# EAGLE board ModuleCarrier-Laird-BL600 (EAGLE 7.7.0)
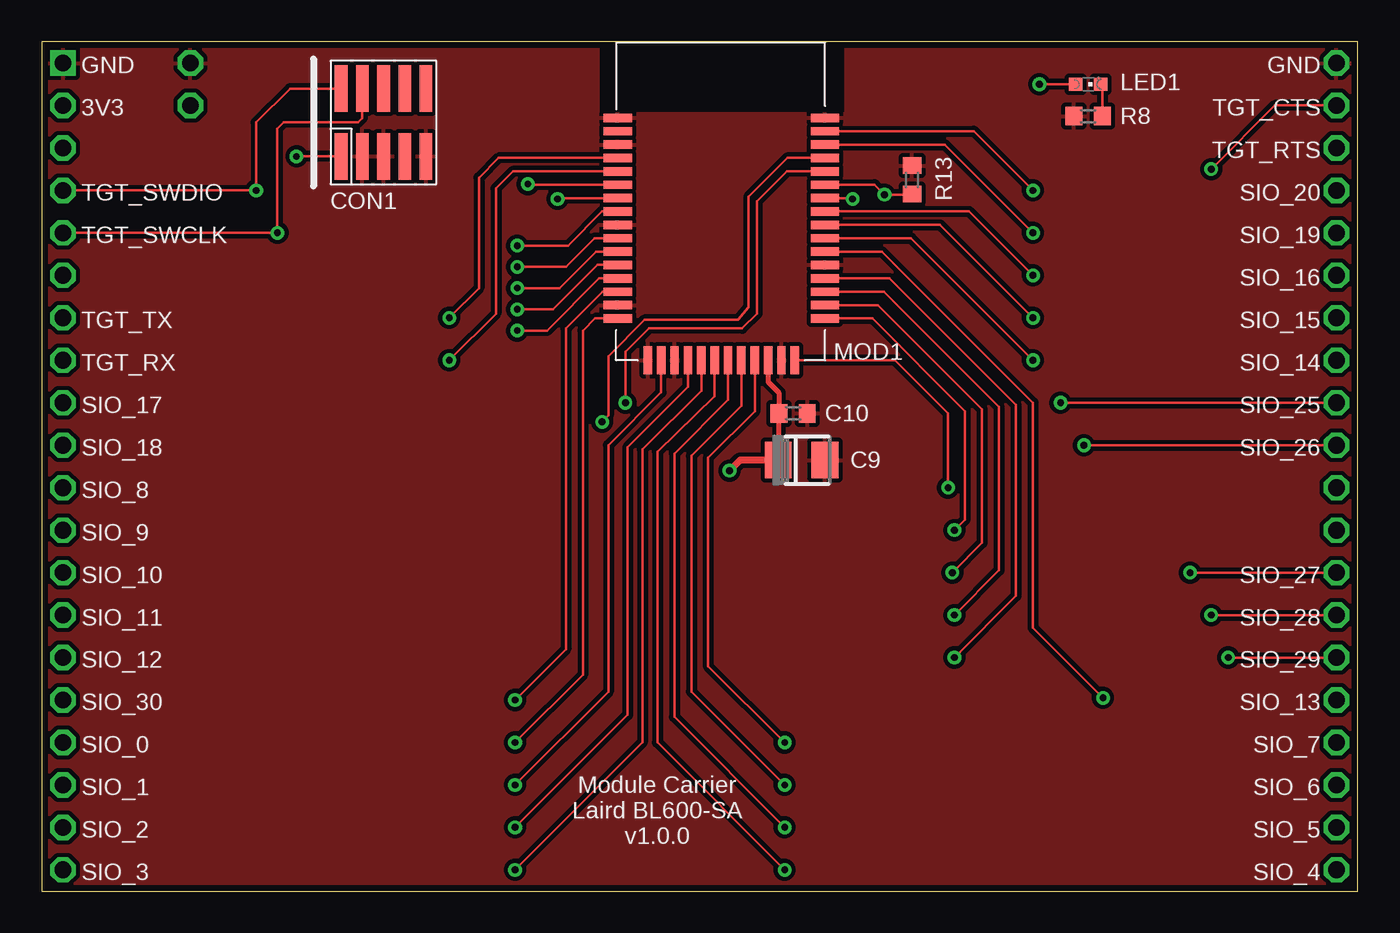
[diagram p0: board, top side]
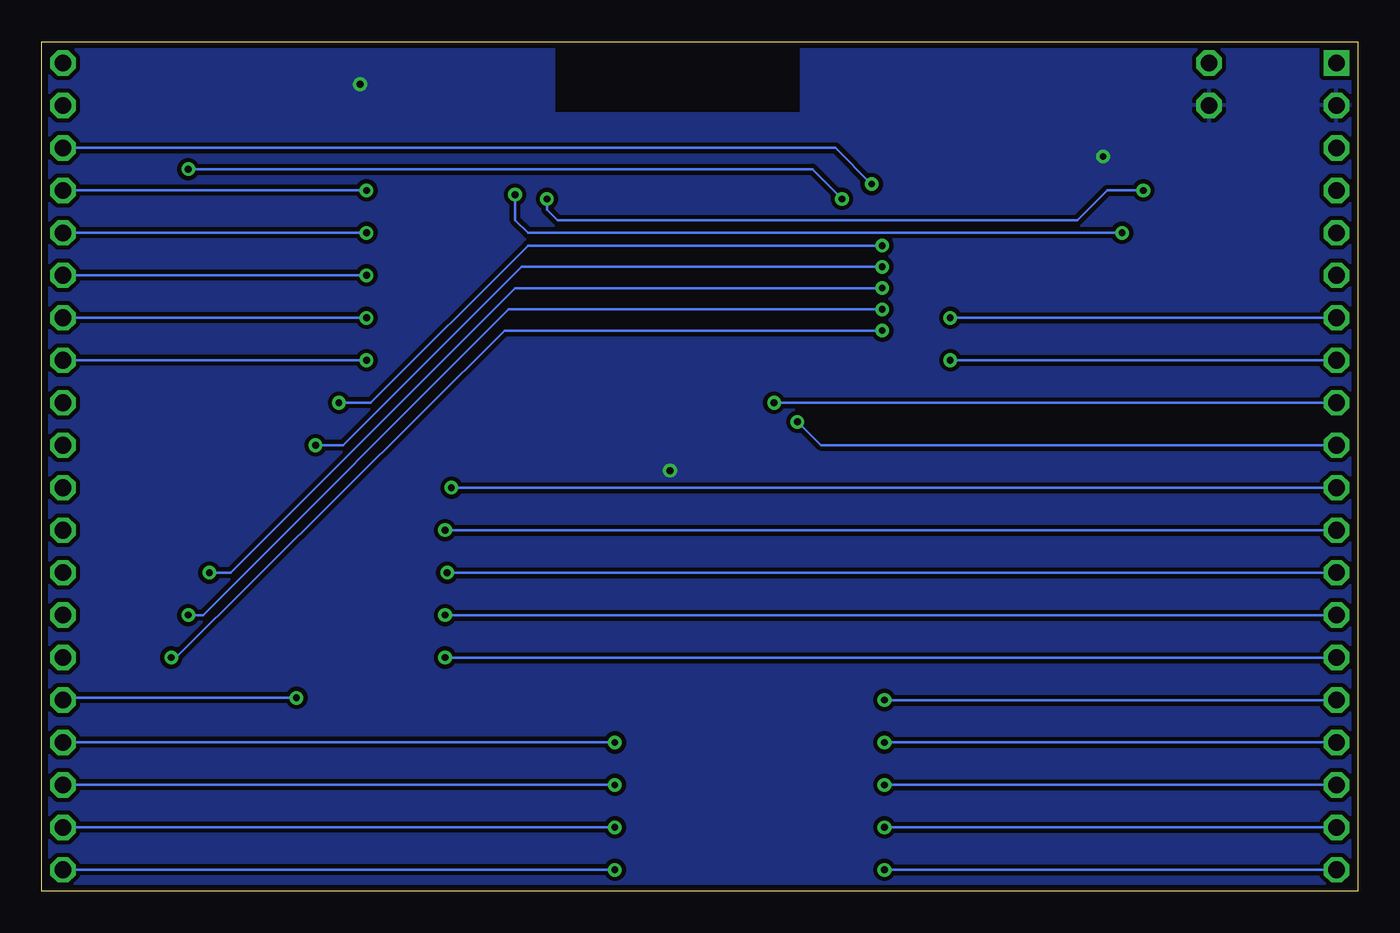
[diagram p1: board, bottom side, seen from below]

Size 78.74 x 50.8 mm. Coordinates in mm from the lower left corner, seen from the top.
Copper layers ((1*16)): Top 0.035mm / dielectric 0.8mm / Bottom 0.035mm
Design rules "mbed-HDK-6-6-2-layer-PCB-Panel": minimum track width 6mil, minimum drill 14mil, track to track 10mil, track to pad 10mil, pad to pad 10mil, via to via 10mil, smd to smd 6mil, copper to edge 15mil, drill to drill 8mil, minimum pad ring 10mil, minimum via ring 8mil, stop-mask expansion 4mil, vias tented up to drill 0mil, thermal gap 10mil
Net classes: 0 default: width 0.152 mm, drill 0.305 mm, clearance 0.152 mm
tRestrict: area 33.4,46.6 to 48,50.8
bRestrict: area 33.4,46.6 to 48,50.8

## Footprints (pad centres in the part's own frame; a part is rotated, then mirrored left to right if it is on the bottom)
CASE-B = smd 1.6 x 2.2: 1 -1.4,0; 2 1.4,0
0603 = smd 1 x 1.1: 1 -0.85,0; 2 0.85,0
FTSH-105-02 = smd 0.762 x 2.794: 1 0.381,-2.032; 2 0.381,2.032; 3 1.651,-2.032; 4 1.651,2.032; 5 2.921,-2.032; 6 2.921,2.032; 7 4.191,-2.032; 8 4.191,2.032; 9 5.461,-2.032; 10 5.461,2.032
CHIPLED_0603 = smd 0.8 x 0.8: A 0,-0.75; C 0,0.75
BL600 = smd 1.7 x 0.5: P$1 0,10.6; P$2 0,9.8; P$3 0,9; P$4 0,8.2; P$5 0,7.4; P$6 0,6.6; P$7 0,5.8; P$8 0,5; P$9 0,4.2; P$10 0,3.4; P$11 0,2.6; P$12 0,1.8 | smd 0.5 x 1.7: P$13 2.5,0; P$14 3.3,0; P$15 4.1,0; P$16 4.9,0; P$17 5.7,0; P$18 6.5,0; P$19 7.3,0; P$20 8.1,0; P$21 8.9,0; P$22 9.7,0; P$23 10.5,0; P$24 11.3,0; P$25 12.1,0; P$26 12.9,0; P$27 13.7,0; P$28 14.5,0; P$29 14.5,12.4; P$30 13.7,12.4; P$31 12.9,12.4; P$32 12.1,12.4; P$33 11.3,12.4; P$34 10.5,12.4; P$35 9.7,12.4; P$36 8.9,12.4; P$37 8.1,12.4; P$38 7.3,12.4; P$39 6.5,12.4; P$40 5.7,12.4; P$41 4.9,12.4; P$42 4.1,12.4; P$43 3.3,12.4; P$44 2.5,12.4
TP50-PTH = drill 1 octagon: TP 0,0
MODULE_DAUGHTER = drill 1 square: 1 0,0 | drill 1 octagon: 2 0,-2.54; 3 0,-5.08; 4 0,-7.62; 5 0,-10.16; 6 0,-12.7; 7 0,-15.24; 8 0,-17.78; 9 0,-20.32; 10 0,-22.86; 11 0,-25.4; 12 0,-27.94; 13 0,-30.48; 14 0,-33.02; 15 0,-35.56; 16 0,-38.1; 17 0,-40.64; 18 0,-43.18; 19 0,-45.72; 20 0,-48.26; 21 76.2,-48.26; 22 76.2,-45.72; 23 76.2,-43.18; 24 76.2,-40.64; 25 76.2,-38.1; 26 76.2,-35.56; 27 76.2,-33.02; 28 76.2,-30.48; 29 76.2,-27.94; 30 76.2,-25.4; 31 76.2,-22.86; 32 76.2,-20.32; 33 76.2,-17.78; 34 76.2,-15.24; 35 76.2,-12.7; 36 76.2,-10.16; 37 76.2,-7.62; 38 76.2,-5.08; 39 76.2,-2.54; 40 76.2,0

## Placement (x,y rotation side)
C9  10uF  [CASE-B]  45.47,25.78 0 top
C10  100nF  [0603]  44.96,28.58 0 top
CON1  SWD-10/TC2050_SMD  [FTSH-105-02]  17.53,45.97 0 top
LED1  RED  [CHIPLED_0603]  62.61,48.26 270 top
MOD1  BL600-SA  [BL600]  46.86,31.75 90 top
R8  1k  [0603]  62.61,46.36 0 top
R13  12k  [0603]  52.07,42.55 270 top
TP1  TEST-POINT-50R-PTH  [TP50-PTH]  8.89,46.99 0 top
TP2  TEST-POINT-50R-PTH  [TP50-PTH]  8.89,49.53 0 top
U$1  MODULE_DAUGHTER  [MODULE_DAUGHTER]  1.27,49.53 0 top

## Library data of the parts
C9 C10 R13 TP1 TP2 = mbed-HDK
CON1 = mbed-HDK-Connector
LED1 = mbed-HDK-Optical; MF: Wurth Electronics Inc; MFN: 150060RS75000; OC-DIGIKEY: 732-4978-1-ND; OC-MOUSER: 710-150060RS75000; OC-NEWARK: 2322071
MOD1 = laird
R8 = mbed-HDK-RLC
U$1 = Treadstone

## Nets
+3.3V_TGT: C9.1 C10.1 CON1.1 LED1.A MOD1.P$10 TP1.TP U$1.2
GND: C9.2 C10.2 CON1.3 CON1.5 CON1.9 MOD1.P$1 MOD1.P$3 MOD1.P$11 MOD1.P$17 MOD1.P$28 MOD1.P$29 MOD1.P$31 MOD1.P$37 MOD1.P$43 R8.1 R13.1 TP2.TP U$1.1 U$1.40
PA_1: LED1.C R8.2
SIO_0: MOD1.P$44 U$1.17
SIO_1: MOD1.P$2 U$1.18
SIO_2: MOD1.P$4 U$1.19
SIO_3: MOD1.P$5 U$1.20
SIO_4: MOD1.P$6 U$1.21
SIO_5: MOD1.P$7 U$1.22
SIO_6: MOD1.P$8 U$1.23
SIO_7: MOD1.P$9 U$1.24
SIO_8: MOD1.P$12 U$1.11
SIO_9: MOD1.P$13 U$1.12
SIO_10: MOD1.P$14 U$1.13
SIO_11: MOD1.P$15 U$1.14
SIO_12: MOD1.P$16 U$1.15
SIO_13: MOD1.P$18 U$1.25
SIO_14: MOD1.P$19 U$1.33
SIO_15: MOD1.P$20 U$1.34
SIO_16: MOD1.P$21 U$1.35
SIO_17: MOD1.P$24 U$1.9
SIO_18: MOD1.P$25 U$1.10
SIO_19: MOD1.P$26 U$1.36
SIO_20: MOD1.P$27 U$1.37
SIO_25: MOD1.P$36 U$1.32
SIO_26: MOD1.P$38 U$1.31
SIO_27: MOD1.P$39 U$1.28
SIO_28: MOD1.P$40 U$1.27
SIO_29: MOD1.P$41 U$1.26
SIO_30: MOD1.P$42 U$1.16
TGT_CTS: MOD1.P$35 U$1.39
TGT_RTS: MOD1.P$34 U$1.38
TGT_RX: MOD1.P$33 U$1.8
TGT_SWCLK: CON1.4 MOD1.P$23 R13.2 U$1.5
TGT_SWDIO: CON1.2 MOD1.P$22 U$1.4
TGT_TX: MOD1.P$32 U$1.7

## Tracks (layer width: path | path; a pad name or v marks a point on that pad's centre or on a via)
+3.3V_TGT  (via drill 0.41)
  Top 0.152: LED1.A v59.69,48.26 | CON1.1 v15.24,43.94
  Top 0.305: C9.1 44.11,25.78 C10.1 44.11,29.81 43.46,30.45 MOD1.P$10
  Top 0.406: MOD1.P$10 43.47,31.74 | C9.1 41.78,25.78 v41.15,25.15
  pour Bottom: 0,0 78.74,0 78.74,50.8 0,50.8
GND
  pour Top: 0,50.8 78.74,50.8 78.74,0 0,0
PA_1
  Top 0.152: LED1.C 63.46,48.26 R8.2
SIO_0  (via drill 0.41)
  Top 0.152: MOD1.P$44 33.11,34.25 32.38,33.53 32.38,12.95 v28.32,8.89
  Bottom 0.152: v28.32,8.89 U$1.17
SIO_1  (via drill 0.41)
  Top 0.152: v28.32,6.35 33.91,11.94 33.91,26.67 37.06,29.82 MOD1.P$2
  Bottom 0.152: v28.32,6.35 U$1.18
SIO_2  (via drill 0.41)
  Top 0.152: v28.32,3.81 35.05,10.54 35.05,26.54 38.66,30.15 MOD1.P$4
  Bottom 0.152: v28.32,3.81 U$1.19
SIO_3  (via drill 0.41)
  Top 0.152: v28.32,1.27 35.94,8.89 35.94,26.42 39.46,29.94 MOD1.P$5
  Bottom 0.152: v28.32,1.27 U$1.20
SIO_4  (via drill 0.41)
  Top 0.152: MOD1.P$6 40.26,29.6 36.83,26.29 36.83,8.89 v44.45,1.27
  Bottom 0.152: v44.45,1.27 U$1.21
SIO_5  (via drill 0.41)
  Top 0.152: MOD1.P$7 41.06,29.38 37.85,26.16 37.85,10.41 v44.45,3.81
  Bottom 0.152: v44.45,3.81 U$1.22
SIO_6  (via drill 0.41)
  Top 0.152: MOD1.P$8 41.86,29.04 38.86,26.04 38.86,11.94 v44.45,6.35
  Bottom 0.152: v44.45,6.35 U$1.23
SIO_7  (via drill 0.41)
  Top 0.152: MOD1.P$9 42.66,28.69 39.88,25.91 39.88,13.46 v44.45,8.89
  Bottom 0.152: v44.45,8.89 U$1.24
SIO_8  (via drill 0.41)
  Top 0.152: v54.23,24.13 54.23,28.58 51.05,31.75 MOD1.P$12
  Bottom 0.152: v54.23,24.13 U$1.11
SIO_9  (via drill 0.41)
  Top 0.152: MOD1.P$13 49.7,34.25 55.25,28.7 55.25,22.23 v54.61,21.59
  Bottom 0.152: v54.61,21.59 U$1.12
SIO_10  (via drill 0.41)
  Top 0.152: MOD1.P$14 50.04,35.05 56.26,28.83 56.26,20.83 v54.48,19.05
  Bottom 0.152: v54.48,19.05 U$1.13
SIO_11  (via drill 0.41)
  Top 0.152: MOD1.P$15 50.38,35.85 57.28,28.96 57.28,19.18 v54.61,16.51
  Bottom 0.152: v54.61,16.51 U$1.14
SIO_12  (via drill 0.41)
  Top 0.152: MOD1.P$16 50.73,36.65 58.29,29.08 58.29,17.65 v54.61,13.97
  Bottom 0.152: v54.61,13.97 U$1.15
SIO_13  (via drill 0.41)
  Top 0.152: MOD1.P$18 50.27,38.25 59.31,29.21 59.31,15.75 v63.5,11.56
  Bottom 0.152: v63.5,11.56 77.34,11.56 U$1.25
SIO_14  (via drill 0.41)
  Top 0.152: MOD1.P$19 52.01,39.05 v59.31,31.75
  Bottom 0.152: v59.31,31.75 U$1.33
SIO_15  (via drill 0.41)
  Top 0.152: MOD1.P$20 53.75,39.85 v59.31,34.29
  Bottom 0.152: v59.31,34.29 U$1.34
SIO_16  (via drill 0.41)
  Top 0.152: MOD1.P$21 55.49,40.65 v59.31,36.83
  Bottom 0.152: v59.31,36.83 U$1.35
SIO_17  (via drill 0.41)
  Top 0.152: MOD1.P$24 44.57,43.05 42.8,41.27 42.8,34.54 41.91,33.66 36.32,33.66 34.93,32.26 v34.93,29.21
  Bottom 0.152: v34.93,29.21 U$1.9
SIO_18  (via drill 0.41)
  Top 0.152: MOD1.P$25 44.61,43.85 42.29,41.53 42.29,34.92 41.66,34.16 36.07,34.16 33.91,32 33.91,28.45 v33.53,28.07
  Bottom 0.152: v33.53,28.07 32.13,26.67 U$1.10
SIO_19  (via drill 0.41)
  Top 0.152: MOD1.P$26 54.03,44.65 v59.31,39.37
  Bottom 0.152: v59.31,39.37 U$1.36
SIO_20  (via drill 0.41)
  Top 0.152: MOD1.P$27 55.77,45.45 v59.31,41.91
  Bottom 0.152: v59.31,41.91 U$1.37
SIO_25  (via drill 0.41)
  Top 0.152: MOD1.P$36 33.54,40.65 31.5,38.61 v28.45,38.61 | v60.96,29.21 U$1.32
  Bottom 0.152: v28.45,38.61 49.66,38.61 59.05,29.21 v60.96,29.21
SIO_26  (via drill 0.41)
  Top 0.152: MOD1.P$38 33.08,39.05 31.37,37.34 v28.45,37.34 | v62.36,26.67 U$1.31
  Bottom 0.152: v28.45,37.34 50.04,37.34 60.71,26.67 v62.36,26.67
SIO_27  (via drill 0.41)
  Top 0.152: MOD1.P$39 33.17,38.25 30.99,36.07 v28.45,36.07 | v68.71,19.05 U$1.28
  Bottom 0.152: v28.45,36.07 50.42,36.07 67.44,19.05 v68.71,19.05
SIO_28  (via drill 0.41)
  Top 0.152: MOD1.P$40 33.26,37.45 30.61,34.8 v28.45,34.8 | v69.98,16.51 U$1.27
  Bottom 0.152: v28.45,34.8 50.8,34.8 69.09,16.51 v69.98,16.51
SIO_29  (via drill 0.41)
  Top 0.152: MOD1.P$41 33.35,36.65 30.23,33.53 v28.45,33.53 | v70.99,13.97 U$1.26
  Bottom 0.152: v28.45,33.53 51.05,33.53 70.74,13.97 v70.99,13.97
SIO_30  (via drill 0.41)
  Top 0.152: MOD1.P$42 33.56,35.85 31.37,33.66 31.37,14.48 v28.32,11.43
  Bottom 0.152: v28.32,11.43 U$1.16
TGT_CTS  (via drill 0.41)
  Top 0.152: MOD1.P$35 30.91,41.45 v30.86,41.4 | U$1.39 73.79,46.99 v69.98,43.18
  Bottom 0.152: v69.98,43.18 32.64,43.18 v30.86,41.4
TGT_RTS  (via drill 0.41)
  Top 0.152: MOD1.P$34 29.04,42.25 v29.08,42.29
  Bottom 0.152: U$1.38 31.24,44.45 v29.08,42.29
TGT_RX  (via drill 0.41)
  Top 0.152: MOD1.P$33 28.19,43.05 27.18,42.04 27.18,34.54 v24.38,31.75
  Bottom 0.152: v24.38,31.75 U$1.8
TGT_SWCLK  (via drill 0.41)
  Top 0.152: MOD1.P$23 49.83,42.25 v50.42,41.66 52.03,41.66 R13.2 | U$1.5 v14.1,39.37 14.1,45.59 14.48,45.97 18.92,45.97 19.18,46.23 CON1.4
  Bottom 0.152: v14.1,39.37 49.66,39.37 50.42,40.13 v50.42,41.66
TGT_SWDIO  (via drill 0.41)
  Top 0.152: MOD1.P$22 48.47,41.45 v48.51,41.4 | U$1.4 v12.83,41.91 12.83,45.97 14.86,48.01 CON1.2
  Bottom 0.152: v48.51,41.4 48.51,40.77 47.88,40.13 16.76,40.13 14.99,41.91 v12.83,41.91
TGT_TX  (via drill 0.41)
  Top 0.152: MOD1.P$32 27.34,43.85 26.16,42.67 26.16,36.07 v24.38,34.29
  Bottom 0.152: v24.38,34.29 U$1.7

## Text on the board
tPlace: GND / 3V3 / / TGT_SWDIO / TGT_SWCLK / / TGT_TX / TGT_RX / SIO_17 / SIO_18 / SIO_8 / SIO_9 / SIO_10 / SIO_11 / SIO_12 / SIO_30 / SIO_0 / SIO_1 / SIO_2 / SIO_3 | GND / TGT_CTS / TGT_RTS / SIO_20 / SIO_19 / SIO_16 / SIO_15 / SIO_14 / SIO_25 / SIO_26 / / / SIO_27 / SIO_28 / SIO_29 / SIO_13 / SIO_7 / SIO_6 / SIO_5 / SIO_4 | Module Carrier / Laird BL600-SA / v1.0.0